# EAGLE board Mego_Bovit_SOIC_3x27P_Kitolt_V11 (EAGLE 7.4.0)
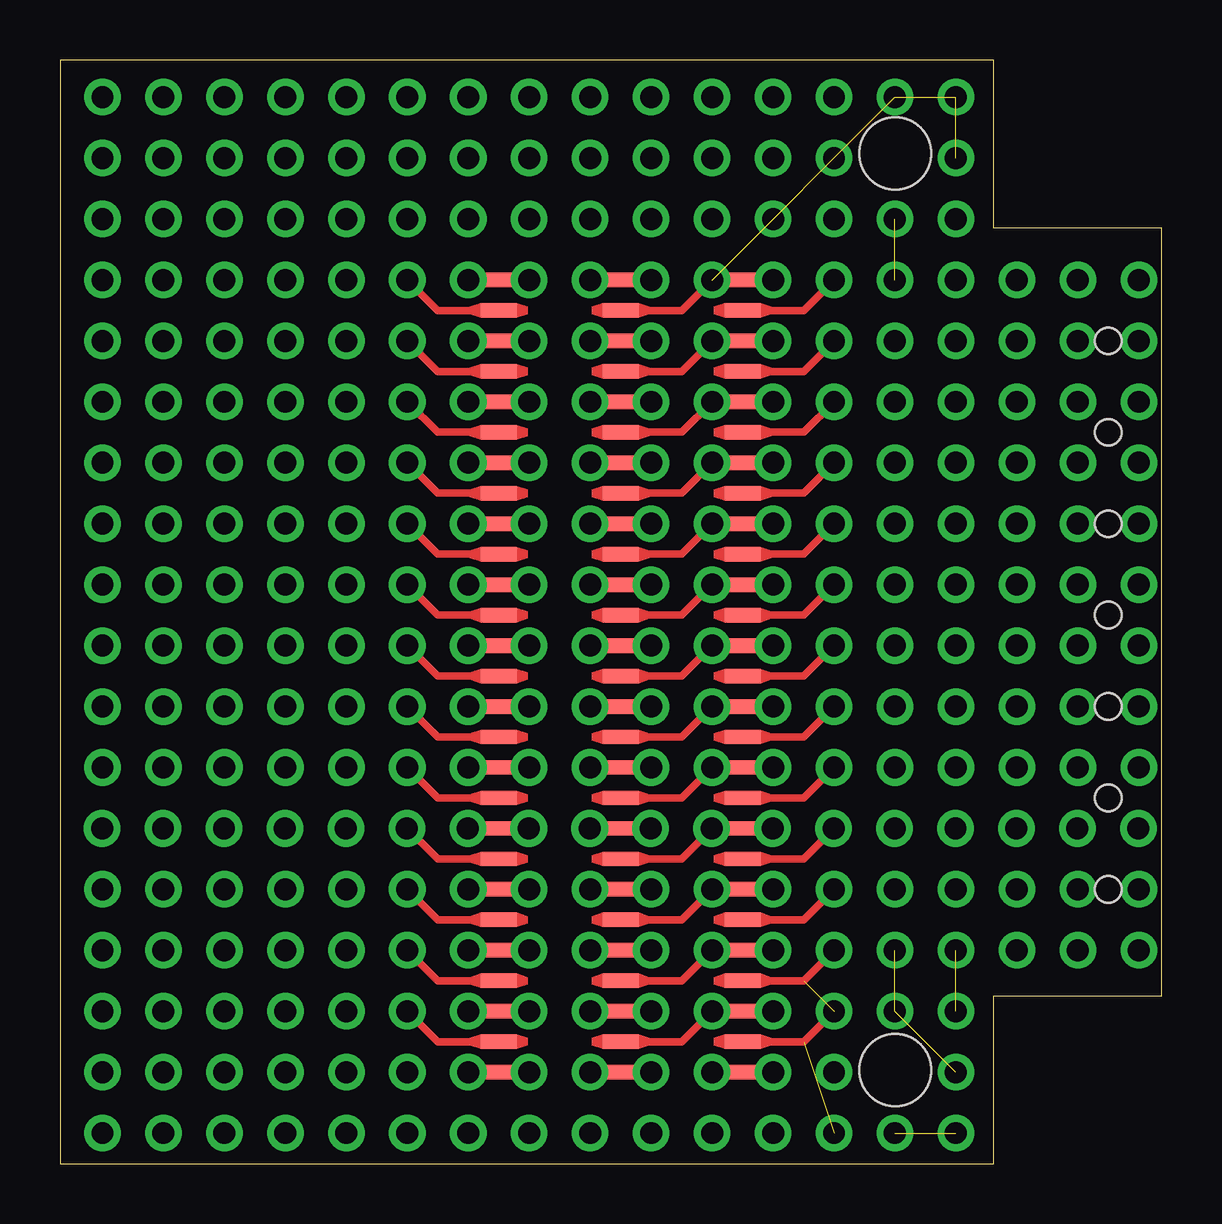
[diagram p0: board, top side]
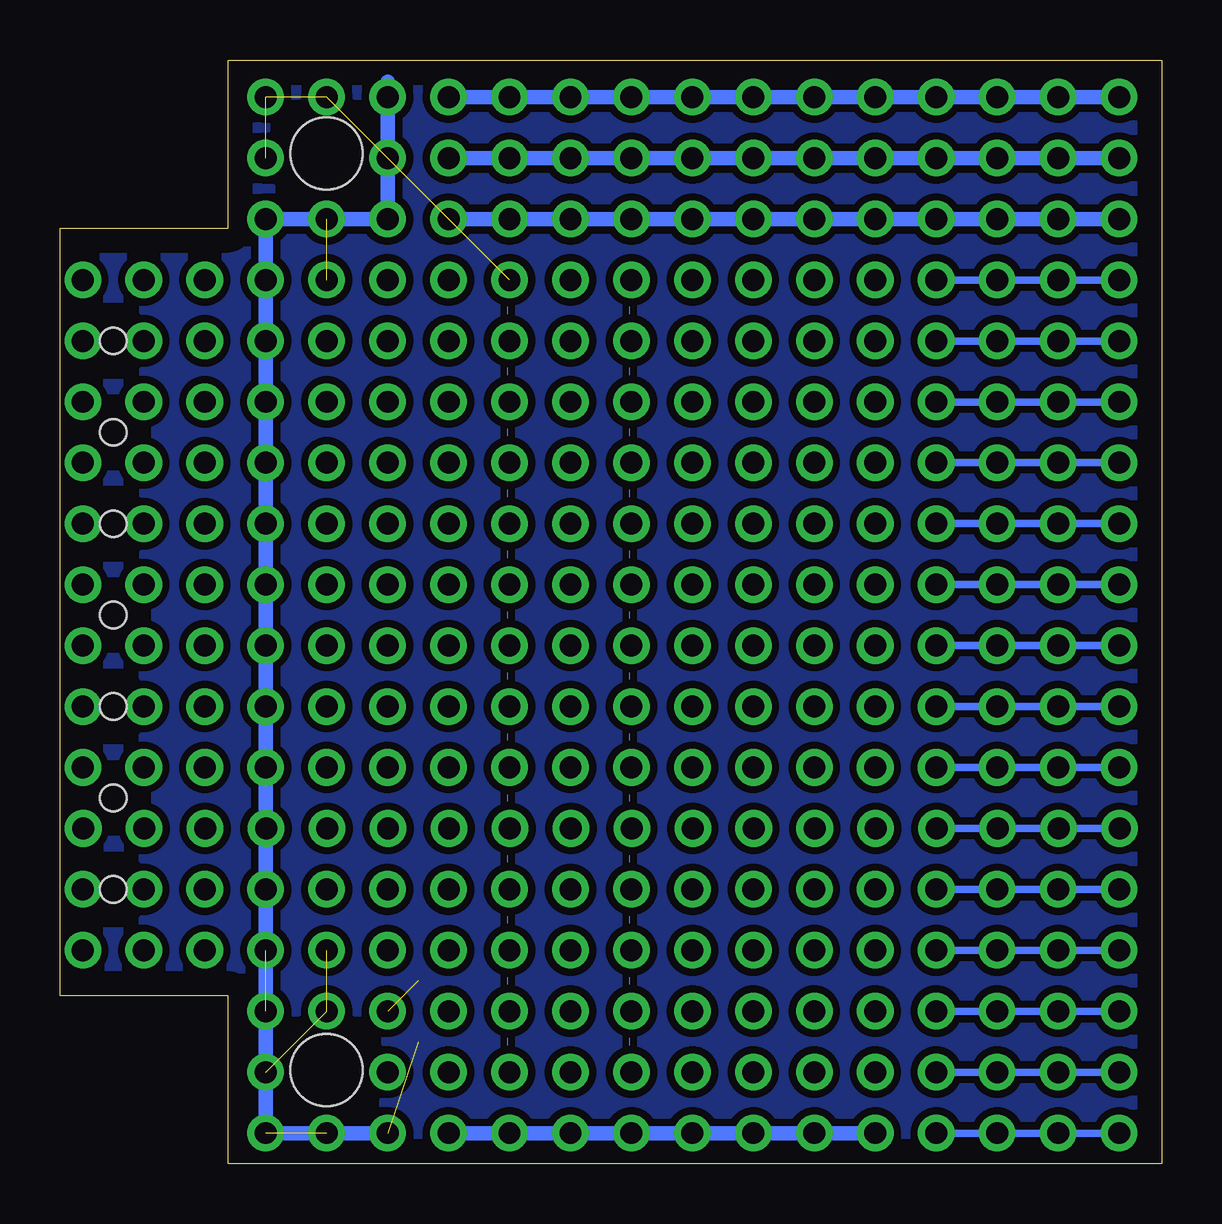
[diagram p1: board, bottom side, seen from below]

Size 45.9 x 46 mm. Coordinates in mm from the lower left corner, seen from the top.
Outline: 38.9,46 0,46 0,0 38.9,0 38.9,7 45.9,7 45.9,39 38.9,39 38.9,46
Copper layers (1*16): Top 0.035mm / dielectric 1.5mm / Bottom 0.035mm
Design rules "default *": minimum track width 10mil, minimum drill 24mil, track to track 12mil, track to pad 12mil, pad to pad 12mil, via to via 12mil, smd to smd 0mil, copper to edge 40mil, drill to drill 8mil, minimum pad ring 10mil, minimum via ring 8mil, stop-mask expansion 4mil, vias tented up to drill 0mil, thermal gap 10mil
Net classes: 0 default: width 0.305 mm, drill 0.61 mm, clearance 0.305 mm
Holes 3 mm at 34.8,42.1 34.8,3.9
Holes 1.1 mm at 43.68,22.86 43.68,26.67 43.68,30.48 43.68,34.29 43.68,19.05 43.68,15.24 43.68,11.43

## Footprints (pad centres in the part's own frame; a part is rotated, then mirrored left to right if it is on the bottom)
SO8PAIR = smd 1.5 x 0.6: 1 2.54,0; 2 -2.54,0

## Placement (x,y rotation side)
E$1  [SO8PAIR]  20.82,36.83 0 top
E$2  [SO8PAIR]  20.82,35.56 0 top
E$3  [SO8PAIR]  20.82,34.29 0 top
E$4  [SO8PAIR]  20.82,33.02 0 top
E$5  [SO8PAIR]  20.82,31.75 0 top
E$6  [SO8PAIR]  20.82,30.48 0 top
E$7  [SO8PAIR]  20.82,29.21 0 top
E$8  [SO8PAIR]  20.82,27.94 0 top
E$9  [SO8PAIR]  20.82,26.67 0 top
E$10  [SO8PAIR]  20.82,25.4 0 top
E$11  [SO8PAIR]  20.82,24.13 0 top
E$12  [SO8PAIR]  20.82,22.86 0 top
E$13  [SO8PAIR]  20.82,21.59 0 top
E$14  [SO8PAIR]  20.82,20.32 0 top
E$15  [SO8PAIR]  20.82,19.05 0 top
E$16  [SO8PAIR]  20.82,17.78 0 top
E$17  [SO8PAIR]  20.82,16.51 0 top
E$18  [SO8PAIR]  20.82,15.24 0 top
E$19  [SO8PAIR]  20.82,13.97 0 top
E$20  [SO8PAIR]  20.82,12.7 0 top
E$21  [SO8PAIR]  20.82,11.43 0 top
E$22  [SO8PAIR]  20.82,10.16 0 top
E$23  [SO8PAIR]  20.82,8.89 0 top
E$24  [SO8PAIR]  20.82,7.62 0 top
E$25  [SO8PAIR]  20.82,6.35 0 top
E$26  [SO8PAIR]  20.82,5.08 0 top
E$27  [SO8PAIR]  20.82,3.81 0 top
E$28  [SO8PAIR]  25.9,36.83 0 top
E$29  [SO8PAIR]  25.9,35.56 0 top
E$30  [SO8PAIR]  25.9,34.29 0 top
E$31  [SO8PAIR]  25.9,33.02 0 top
E$32  [SO8PAIR]  25.9,31.75 0 top
E$33  [SO8PAIR]  25.9,30.48 0 top
E$34  [SO8PAIR]  25.9,29.21 0 top
E$35  [SO8PAIR]  25.9,27.94 0 top
E$36  [SO8PAIR]  25.9,26.67 0 top
E$37  [SO8PAIR]  25.9,25.4 0 top
E$38  [SO8PAIR]  25.9,24.13 0 top
E$39  [SO8PAIR]  25.9,22.86 0 top
E$40  [SO8PAIR]  25.9,21.59 0 top
E$41  [SO8PAIR]  25.9,20.32 0 top
E$42  [SO8PAIR]  25.9,19.05 0 top
E$43  [SO8PAIR]  25.9,17.78 0 top
E$44  [SO8PAIR]  25.9,16.51 0 top
E$45  [SO8PAIR]  25.9,15.24 0 top
E$46  [SO8PAIR]  25.9,13.97 0 top
E$47  [SO8PAIR]  25.9,12.7 0 top
E$48  [SO8PAIR]  25.9,11.43 0 top
E$49  [SO8PAIR]  25.9,10.16 0 top
E$50  [SO8PAIR]  25.9,8.89 0 top
E$51  [SO8PAIR]  25.9,7.62 0 top
E$52  [SO8PAIR]  25.9,6.35 0 top
E$53  [SO8PAIR]  25.9,5.08 0 top
E$54  [SO8PAIR]  25.9,3.81 0 top

## Library data of the parts
E$1-E$54 = Cf_UC

## Tracks (layer width: path | path; a pad name or v marks a point on that pad's centre or on a via)
N$1
  Top 0.305: 18.28,17.78 15.74,17.78 14.47,19.05
N$2
  Top 0.305: 23.36,17.78 25.9,17.78 27.17,19.05
N$3
  Top 0.305: 18.28,15.24 15.74,15.24 14.47,16.51
N$4
  Top 0.305: 23.36,15.24 25.9,15.24 27.17,16.51
N$5
  Top 0.305: 18.28,12.7 15.74,12.7 14.47,13.97
N$6
  Top 0.305: 23.36,12.7 25.9,12.7 27.17,13.97
N$7
  Top 0.305: 18.28,10.16 15.74,10.16 14.47,11.43
N$8
  Top 0.305: 23.36,10.16 25.9,10.16 27.17,11.43
N$9
  Top 0.305: 18.28,7.62 15.74,7.62 14.47,8.89
N$10
  Top 0.305: 23.36,7.62 25.9,7.62 27.17,8.89
N$11
  Top 0.305: 18.28,5.08 15.74,5.08 14.47,6.35
N$12
  Top 0.305: 23.36,5.08 25.9,5.08 27.17,6.35
N$62  (via drill 0.91 pad 1.52)
  other vias: 1.75,13.97
N$63  (via drill 0.91 pad 1.52)
  Bottom 0.305: v1.77,16.51 v9.39,16.51
N$64  (via drill 0.91 pad 1.52)
  Bottom 0.305: v1.77,19.05 v9.39,19.05
N$65  (via drill 0.91 pad 1.52)
  Bottom 0.305: v1.77,21.59 v9.39,21.59
N$66  (via drill 0.91 pad 1.52)
  Bottom 0.305: v1.77,24.13 v9.39,24.13
N$68  (via drill 0.91 pad 1.52)
  Bottom 0.305: v1.77,1.27 v9.39,1.27
N$69  (via drill 0.91 pad 1.52)
  Bottom 0.305: v1.77,3.81 v9.39,3.81
N$71  (via drill 0.91 pad 1.52)
  Bottom 0.305: v1.77,8.89 v9.39,8.89
N$72  (via drill 0.91 pad 1.52)
  Bottom 0.305: v1.77,26.67 v9.39,26.67
N$73  (via drill 0.91 pad 1.52)
  Bottom 0.305: v1.77,29.21 v9.39,29.21
N$74  (via drill 0.91 pad 1.52)
  Bottom 0.305: v1.77,31.75 v9.39,31.75
N$75  (via drill 0.91 pad 1.52)
  Bottom 0.305: v1.77,34.29 v9.39,34.29
N$76  (via drill 0.91 pad 1.52)
  Bottom 0.305: v1.77,36.83 v9.39,36.83
N$77  (via drill 0.91 pad 1.52)
  Bottom 0.61: v1.77,39.37 v29.71,39.37
N$78  (via drill 0.91 pad 1.52)
  Bottom 0.61: v1.77,41.91 v29.71,41.91
N$79  (via drill 0.91 pad 1.52)
  Bottom 0.61: v1.77,44.45 v29.71,44.45
N$80  (via drill 0.91 pad 1.52)
  other vias: 4.29,13.97
N$82  (via drill 0.91 pad 1.52)
  other vias: 4.31,16.51
N$83  (via drill 0.91 pad 1.52)
  other vias: 4.31,19.05
N$84  (via drill 0.91 pad 1.52)
  other vias: 4.31,21.59
N$85  (via drill 0.91 pad 1.52)
  other vias: 4.31,24.13
N$86  (via drill 0.91 pad 1.52)
  other vias: 4.31,11.43
N$87  (via drill 0.91 pad 1.52)
  other vias: 4.31,1.27
N$88  (via drill 0.91 pad 1.52)
  other vias: 4.31,3.81
N$89  (via drill 0.91 pad 1.52)
  other vias: 4.31,6.35
N$90  (via drill 0.91 pad 1.52)
  other vias: 4.31,8.89
N$91  (via drill 0.91 pad 1.52)
  other vias: 4.31,26.67
N$92  (via drill 0.91 pad 1.52)
  other vias: 4.31,29.21
N$93  (via drill 0.91 pad 1.52)
  other vias: 4.31,31.75
N$94  (via drill 0.91 pad 1.52)
  other vias: 4.31,34.29
N$95  (via drill 0.91 pad 1.52)
  other vias: 4.31,36.83
N$96  (via drill 0.91 pad 1.52)
  other vias: 4.31,39.37
N$97  (via drill 0.91 pad 1.52)
  other vias: 4.31,41.91
N$98  (via drill 0.91 pad 1.52)
  other vias: 4.31,44.45
N$99  (via drill 0.91 pad 1.52)
  other vias: 6.83,13.97
N$100  (via drill 0.91 pad 1.52)
  other vias: 6.85,16.51
N$101  (via drill 0.91 pad 1.52)
  other vias: 6.85,19.05
N$102  (via drill 0.91 pad 1.52)
  other vias: 6.85,21.59
N$103  (via drill 0.91 pad 1.52)
  other vias: 6.85,24.13
N$104  (via drill 0.91 pad 1.52)
  other vias: 6.85,11.43
N$105  (via drill 0.91 pad 1.52)
  other vias: 6.85,1.27
N$106  (via drill 0.91 pad 1.52)
  other vias: 6.85,3.81
N$107  (via drill 0.91 pad 1.52)
  other vias: 6.85,6.35
N$108  (via drill 0.91 pad 1.52)
  other vias: 6.85,8.89
N$109  (via drill 0.91 pad 1.52)
  other vias: 6.85,26.67
N$110  (via drill 0.91 pad 1.52)
  other vias: 6.85,29.21
N$111  (via drill 0.91 pad 1.52)
  other vias: 6.85,31.75
N$112  (via drill 0.91 pad 1.52)
  other vias: 6.85,34.29
N$113  (via drill 0.91 pad 1.52)
  other vias: 6.85,36.83
N$114  (via drill 0.91 pad 1.52)
  other vias: 6.85,39.37
N$115  (via drill 0.91 pad 1.52)
  other vias: 6.85,41.91
N$116  (via drill 0.91 pad 1.52)
  other vias: 6.85,44.45
N$117  (via drill 0.91 pad 1.52)
  other vias: 9.37,13.97
N$118
  Bottom 0.305: 1.77,13.97 9.39,13.97
N$122  (via drill 0.91 pad 1.52)
  Bottom 0.305: v9.39,11.43 v1.77,11.43
N$125  (via drill 0.91 pad 1.52)
  Bottom 0.305: v9.39,6.35 v1.77,6.35
N$132  (via drill 0.91 pad 1.52)
  other vias: 9.39,39.37
N$133  (via drill 0.91 pad 1.52)
  other vias: 9.39,41.91
N$134  (via drill 0.91 pad 1.52)
  other vias: 9.39,44.45
N$135  (via drill 0.91 pad 1.52)
  other vias: 11.91,13.97
N$136  (via drill 0.91 pad 1.52)
  other vias: 11.93,16.51
N$137  (via drill 0.91 pad 1.52)
  other vias: 11.93,19.05
N$138  (via drill 0.91 pad 1.52)
  other vias: 11.93,21.59
N$139  (via drill 0.91 pad 1.52)
  other vias: 11.93,24.13
N$140  (via drill 0.91 pad 1.52)
  other vias: 11.93,11.43
N$142  (via drill 0.91 pad 1.52)
  other vias: 11.93,3.81
N$143  (via drill 0.91 pad 1.52)
  other vias: 11.93,6.35
N$144  (via drill 0.91 pad 1.52)
  other vias: 11.93,8.89
N$145  (via drill 0.91 pad 1.52)
  other vias: 11.93,26.67
N$146  (via drill 0.91 pad 1.52)
  other vias: 11.93,29.21
N$147  (via drill 0.91 pad 1.52)
  other vias: 11.93,31.75
N$148  (via drill 0.91 pad 1.52)
  other vias: 11.93,34.29
N$149  (via drill 0.91 pad 1.52)
  other vias: 11.93,36.83
N$150  (via drill 0.91 pad 1.52)
  other vias: 11.93,39.37
N$151  (via drill 0.91 pad 1.52)
  other vias: 11.93,41.91
N$152  (via drill 0.91 pad 1.52)
  other vias: 11.93,44.45
N$153  (via drill 0.91 pad 1.52)
  other vias: 14.45,13.97
N$154  (via drill 0.91 pad 1.52)
  other vias: 14.47,16.51
N$155  (via drill 0.91 pad 1.52)
  other vias: 14.47,19.05
N$156  (via drill 0.91 pad 1.52)
  Top 0.305: 18.28,20.32 15.74,20.32 v14.47,21.59
N$157  (via drill 0.91 pad 1.52)
  Top 0.305: 18.28,22.86 15.74,22.86 v14.47,24.13
N$158  (via drill 0.91 pad 1.52)
  other vias: 14.47,11.43
N$159  (via drill 0.91 pad 1.52)
  other vias: 14.47,1.27
N$160  (via drill 0.91 pad 1.52)
  other vias: 14.47,3.81
N$161  (via drill 0.91 pad 1.52)
  other vias: 14.47,6.35
N$162  (via drill 0.91 pad 1.52)
  other vias: 14.47,8.89
N$163  (via drill 0.91 pad 1.52)
  Top 0.305: 18.28,25.4 15.74,25.4 v14.47,26.67
N$164  (via drill 0.91 pad 1.52)
  Top 0.305: 18.28,27.94 15.74,27.94 v14.47,29.21
N$165  (via drill 0.91 pad 1.52)
  Top 0.305: 18.28,30.48 15.74,30.48 v14.47,31.75
N$166  (via drill 0.91 pad 1.52)
  Top 0.305: 18.28,33.02 15.74,33.02 v14.47,34.29
N$167  (via drill 0.91 pad 1.52)
  Top 0.305: 18.28,35.56 15.74,35.56 v14.47,36.83
N$168  (via drill 0.91 pad 1.52)
  other vias: 14.47,39.37
N$169  (via drill 0.91 pad 1.52)
  other vias: 14.47,41.91
N$170  (via drill 0.91 pad 1.52)
  other vias: 14.47,44.45
N$171  (via drill 0.91 pad 1.52)
  other vias: 16.99,13.97
N$172  (via drill 0.91 pad 1.52)
  other vias: 17.01,16.51
N$173  (via drill 0.91 pad 1.52)
  other vias: 17.01,19.05
N$174  (via drill 0.91 pad 1.52)
  other vias: 17.01,21.59
N$175  (via drill 0.91 pad 1.52)
  other vias: 17.01,24.13
N$176  (via drill 0.91 pad 1.52)
  other vias: 17.01,11.43
N$177  (via drill 0.91 pad 1.52)
  other vias: 17.01,1.27
N$178  (via drill 0.91 pad 1.52)
  other vias: 17.01,3.81
N$179  (via drill 0.91 pad 1.52)
  other vias: 17.01,6.35
N$180  (via drill 0.91 pad 1.52)
  other vias: 17.01,8.89
N$181  (via drill 0.91 pad 1.52)
  other vias: 17.01,26.67
N$182  (via drill 0.91 pad 1.52)
  other vias: 17.01,29.21
N$183  (via drill 0.91 pad 1.52)
  other vias: 17.01,31.75
N$184  (via drill 0.91 pad 1.52)
  other vias: 17.01,34.29
N$185  (via drill 0.91 pad 1.52)
  other vias: 17.01,36.83
N$186  (via drill 0.91 pad 1.52)
  other vias: 17.01,39.37
N$187  (via drill 0.91 pad 1.52)
  other vias: 17.01,41.91
N$189  (via drill 0.91 pad 1.52)
  other vias: 17.01,44.45
N$190  (via drill 0.91 pad 1.52)
  other vias: 19.53,13.97
N$191  (via drill 0.91 pad 1.52)
  other vias: 19.55,16.51
N$192  (via drill 0.91 pad 1.52)
  other vias: 19.55,19.05
N$193  (via drill 0.91 pad 1.52)
  other vias: 19.55,21.59
N$194  (via drill 0.91 pad 1.52)
  other vias: 19.55,24.13
N$195  (via drill 0.91 pad 1.52)
  other vias: 19.55,11.43
N$196  (via drill 0.91 pad 1.52)
  other vias: 19.55,1.27
N$197  (via drill 0.91 pad 1.52)
  other vias: 19.55,3.81
N$198  (via drill 0.91 pad 1.52)
  other vias: 19.55,6.35
N$199  (via drill 0.91 pad 1.52)
  other vias: 19.55,8.89
N$200  (via drill 0.91 pad 1.52)
  other vias: 19.55,26.67
N$201  (via drill 0.91 pad 1.52)
  other vias: 19.55,29.21
N$202  (via drill 0.91 pad 1.52)
  other vias: 19.55,31.75
N$203  (via drill 0.91 pad 1.52)
  other vias: 19.55,34.29
N$204  (via drill 0.91 pad 1.52)
  other vias: 19.55,36.83
N$205  (via drill 0.91 pad 1.52)
  other vias: 19.55,39.37
N$206  (via drill 0.91 pad 1.52)
  other vias: 19.55,41.91
N$207  (via drill 0.91 pad 1.52)
  other vias: 19.55,44.45
N$208  (via drill 0.91 pad 1.52)
  other vias: 22.07,13.97
N$209  (via drill 0.91 pad 1.52)
  other vias: 22.09,16.51
N$210  (via drill 0.91 pad 1.52)
  other vias: 22.09,19.05
N$211  (via drill 0.91 pad 1.52)
  other vias: 22.09,21.59
N$212  (via drill 0.91 pad 1.52)
  other vias: 22.09,24.13
N$213  (via drill 0.91 pad 1.52)
  other vias: 22.09,11.43
N$214  (via drill 0.91 pad 1.52)
  other vias: 22.09,1.27
N$215  (via drill 0.91 pad 1.52)
  other vias: 22.09,3.81
N$216  (via drill 0.91 pad 1.52)
  other vias: 22.09,6.35
N$217  (via drill 0.91 pad 1.52)
  other vias: 22.09,8.89
N$218  (via drill 0.91 pad 1.52)
  other vias: 22.09,26.67
N$219  (via drill 0.91 pad 1.52)
  other vias: 22.09,29.21
N$220  (via drill 0.91 pad 1.52)
  other vias: 22.09,31.75
N$221  (via drill 0.91 pad 1.52)
  other vias: 22.09,34.29
N$222  (via drill 0.91 pad 1.52)
  other vias: 22.09,36.83
N$224  (via drill 0.91 pad 1.52)
  other vias: 22.09,39.37
N$225  (via drill 0.91 pad 1.52)
  other vias: 22.09,41.91
N$226  (via drill 0.91 pad 1.52)
  other vias: 22.09,44.45
N$227  (via drill 0.91 pad 1.52)
  other vias: 24.61,13.97
N$228  (via drill 0.91 pad 1.52)
  other vias: 24.63,16.51
N$229  (via drill 0.91 pad 1.52)
  other vias: 24.63,19.05
N$230  (via drill 0.91 pad 1.52)
  other vias: 24.63,21.59
N$231  (via drill 0.91 pad 1.52)
  other vias: 24.63,24.13
N$232  (via drill 0.91 pad 1.52)
  other vias: 24.63,11.43
N$233  (via drill 0.91 pad 1.52)
  other vias: 24.63,1.27
N$234  (via drill 0.91 pad 1.52)
  other vias: 24.63,3.81
N$235  (via drill 0.91 pad 1.52)
  other vias: 24.63,6.35
N$236  (via drill 0.91 pad 1.52)
  other vias: 24.63,8.89
N$237  (via drill 0.91 pad 1.52)
  other vias: 24.63,26.67
N$238  (via drill 0.91 pad 1.52)
  other vias: 24.63,29.21
N$239  (via drill 0.91 pad 1.52)
  other vias: 24.63,31.75
N$240  (via drill 0.91 pad 1.52)
  other vias: 24.63,34.29
N$241  (via drill 0.91 pad 1.52)
  other vias: 24.63,36.83
N$242  (via drill 0.91 pad 1.52)
  other vias: 24.63,39.37
N$243  (via drill 0.91 pad 1.52)
  other vias: 24.63,41.91
N$244  (via drill 0.91 pad 1.52)
  other vias: 24.63,44.45
N$245  (via drill 0.91 pad 1.52)
  other vias: 27.15,13.97
N$246  (via drill 0.91 pad 1.52)
  other vias: 27.17,16.51
N$247  (via drill 0.91 pad 1.52)
  other vias: 27.17,19.05
N$248  (via drill 0.91 pad 1.52)
  Top 0.305: 23.36,20.32 25.9,20.32 v27.17,21.59
N$249  (via drill 0.91 pad 1.52)
  Top 0.305: 23.36,22.86 25.9,22.86 v27.17,24.13
N$250  (via drill 0.91 pad 1.52)
  other vias: 27.17,11.43
N$251  (via drill 0.91 pad 1.52)
  other vias: 27.17,1.27
N$252  (via drill 0.91 pad 1.52)
  other vias: 27.17,3.81
N$253  (via drill 0.91 pad 1.52)
  other vias: 27.17,6.35
N$254  (via drill 0.91 pad 1.52)
  other vias: 27.17,8.89
N$255  (via drill 0.91 pad 1.52)
  Top 0.305: 23.36,25.4 25.9,25.4 v27.17,26.67
N$256  (via drill 0.91 pad 1.52)
  Top 0.305: 23.36,27.94 25.9,27.94 v27.17,29.21
N$257  (via drill 0.91 pad 1.52)
  Top 0.305: 23.36,30.48 25.9,30.48 v27.17,31.75
N$258  (via drill 0.91 pad 1.52)
  Top 0.305: 23.36,33.02 25.9,33.02 v27.17,34.29
N$259  (via drill 0.91 pad 1.52)  (3 unrouted)
  Top 0.305: 23.36,35.56 25.9,35.56 v27.17,36.83
  other vias: 37.33,44.45 34.79,44.45 37.33,41.91
N$260  (via drill 0.91 pad 1.52)
  other vias: 27.17,39.37
N$261  (via drill 0.91 pad 1.52)
  other vias: 27.17,41.91
N$262  (via drill 0.91 pad 1.52)
  other vias: 27.17,44.45
N$263  (via drill 0.91 pad 1.52)
  other vias: 29.69,13.97
N$264  (via drill 0.91 pad 1.52)
  other vias: 29.71,16.51
N$265  (via drill 0.91 pad 1.52)
  other vias: 29.71,19.05
N$266  (via drill 0.91 pad 1.52)
  other vias: 29.71,21.59
N$267  (via drill 0.91 pad 1.52)
  other vias: 29.71,24.13
N$268  (via drill 0.91 pad 1.52)
  other vias: 29.71,11.43
N$269  (via drill 0.91 pad 1.52)
  Bottom 0.61: v29.71,1.27 v11.93,1.27
N$270  (via drill 0.91 pad 1.52)
  other vias: 29.71,3.81
N$271  (via drill 0.91 pad 1.52)
  other vias: 29.71,6.35
N$272  (via drill 0.91 pad 1.52)
  other vias: 29.71,8.89
N$273  (via drill 0.91 pad 1.52)
  other vias: 29.71,26.67
N$274  (via drill 0.91 pad 1.52)
  other vias: 29.71,29.21
N$275  (via drill 0.91 pad 1.52)
  other vias: 29.71,31.75
N$276  (via drill 0.91 pad 1.52)
  other vias: 29.71,34.29
N$277  (via drill 0.91 pad 1.52)
  other vias: 29.71,36.83
N$281  (via drill 0.91 pad 1.52)
  other vias: 32.23,13.97
N$282  (via drill 0.91 pad 1.52)
  Top 0.305: 28.44,15.24 30.98,15.24 v32.25,16.51
N$283  (via drill 0.91 pad 1.52)
  Top 0.305: 28.44,17.78 30.98,17.78 v32.25,19.05
N$284  (via drill 0.91 pad 1.52)
  Top 0.305: 28.44,20.32 30.98,20.32 v32.25,21.59
N$285  (via drill 0.91 pad 1.52)
  Top 0.305: 28.44,22.86 30.98,22.86 v32.25,24.13
N$286  (via drill 0.91 pad 1.52)
  Top 0.305: 28.44,10.16 30.98,10.16 v32.25,11.43
N$288  (via drill 0.91 pad 1.52)
  other vias: 32.25,3.81
N$291  (via drill 0.91 pad 1.52)
  Top 0.305: 28.44,25.4 30.98,25.4 v32.25,26.67
N$292  (via drill 0.91 pad 1.52)
  Top 0.305: 28.44,27.94 30.98,27.94 v32.25,29.21
N$293  (via drill 0.91 pad 1.52)
  Top 0.305: 28.44,30.48 30.98,30.48 v32.25,31.75
N$294  (via drill 0.91 pad 1.52)
  Top 0.305: 28.44,33.02 30.98,33.02 v32.25,34.29
N$295  (via drill 0.91 pad 1.52)
  Top 0.305: 28.44,35.56 30.98,35.56 v32.25,36.83
N$296  (via drill 0.91 pad 1.52)  (4 unrouted)
  Top 0.305: 28.44,5.08 30.98,5.08 v32.25,6.35 | 28.44,7.62 30.98,7.62 v32.25,8.89
  Bottom 0.61: 32.25,45.09 v32.25,39.37 v37.33,39.37 v37.33,36.83 v37.33,6.35 v37.33,1.27 v32.25,1.27
  other vias: 37.33,8.89 34.79,1.27
N$297  (via drill 0.91 pad 1.52)
  other vias: 32.25,41.91
N$298  (via drill 0.91 pad 1.52)
  other vias: 32.25,44.45
N$299  (via drill 0.91 pad 1.52)
  other vias: 34.77,13.97
N$300  (via drill 0.91 pad 1.52)
  other vias: 34.79,16.51
N$301  (via drill 0.91 pad 1.52)
  other vias: 34.79,19.05
N$302  (via drill 0.91 pad 1.52)
  other vias: 34.79,21.59
N$303  (via drill 0.91 pad 1.52)
  other vias: 34.79,24.13
N$304  (via drill 0.91 pad 1.52)
  other vias: 34.79,11.43
N$305  (via drill 0.91 pad 1.52)  (2 unrouted)
  other vias: 34.79,8.89 34.79,6.35 37.33,3.81
N$306  (via drill 0.91 pad 1.52)
  other vias: 34.79,26.67
N$307  (via drill 0.91 pad 1.52)
  other vias: 34.79,29.21
N$308  (via drill 0.91 pad 1.52)
  other vias: 34.79,31.75
N$309  (via drill 0.91 pad 1.52)
  other vias: 34.79,34.29
N$310  (via drill 0.91 pad 1.52)  (1 unrouted)
  other vias: 34.79,36.83 34.79,39.37
N$311  (via drill 0.91 pad 1.52)
  other vias: 37.31,13.97
N$312  (via drill 0.91 pad 1.52)
  other vias: 37.33,16.51
N$313  (via drill 0.91 pad 1.52)
  other vias: 37.33,19.05
N$314  (via drill 0.91 pad 1.52)
  other vias: 37.33,21.59
N$315  (via drill 0.91 pad 1.52)
  other vias: 37.33,24.13
N$316  (via drill 0.91 pad 1.52)
  other vias: 37.33,11.43
N$318  (via drill 0.91 pad 1.52)
  other vias: 37.33,26.67
N$319  (via drill 0.91 pad 1.52)
  other vias: 37.33,29.21
N$320  (via drill 0.91 pad 1.52)
  other vias: 37.33,31.75
N$321  (via drill 0.91 pad 1.52)
  other vias: 37.33,34.29
N$323  (via drill 0.91 pad 1.52)
  other vias: 39.85,13.97
N$324  (via drill 0.91 pad 1.52)
  other vias: 39.87,16.51
N$325  (via drill 0.91 pad 1.52)
  other vias: 39.87,19.05
N$326  (via drill 0.91 pad 1.52)
  other vias: 39.87,21.59
N$327  (via drill 0.91 pad 1.52)
  other vias: 39.87,24.13
N$328  (via drill 0.91 pad 1.52)
  other vias: 39.87,11.43
N$329  (via drill 0.91 pad 1.52)
  other vias: 39.87,8.89
N$330  (via drill 0.91 pad 1.52)
  other vias: 39.87,26.67
N$331  (via drill 0.91 pad 1.52)
  other vias: 39.87,29.21
N$332  (via drill 0.91 pad 1.52)
  other vias: 39.87,31.75
N$333  (via drill 0.91 pad 1.52)
  other vias: 39.87,34.29
N$334  (via drill 0.91 pad 1.52)
  other vias: 39.87,36.83
N$335  (via drill 0.91 pad 1.52)
  other vias: 42.39,13.97
N$336  (via drill 0.91 pad 1.52)
  other vias: 42.41,16.51
N$337  (via drill 0.91 pad 1.52)
  other vias: 42.41,19.05
N$338  (via drill 0.91 pad 1.52)
  other vias: 42.41,21.59
N$339  (via drill 0.91 pad 1.52)
  other vias: 42.41,24.13
N$340  (via drill 0.91 pad 1.52)
  other vias: 42.41,11.43
N$341  (via drill 0.91 pad 1.52)
  other vias: 42.41,8.89
N$342  (via drill 0.91 pad 1.52)
  other vias: 42.41,26.67
N$343  (via drill 0.91 pad 1.52)
  other vias: 42.41,29.21
N$344  (via drill 0.91 pad 1.52)
  other vias: 42.41,31.75
N$345  (via drill 0.91 pad 1.52)
  other vias: 42.41,34.29
N$346  (via drill 0.91 pad 1.52)
  other vias: 42.41,36.83
N$347  (via drill 0.91 pad 1.52)
  other vias: 44.93,13.97
N$348  (via drill 0.91 pad 1.52)
  other vias: 44.95,16.51
N$349  (via drill 0.91 pad 1.52)
  other vias: 44.95,19.05
N$350  (via drill 0.91 pad 1.52)
  other vias: 44.95,21.59
N$351  (via drill 0.91 pad 1.52)
  other vias: 44.95,24.13
N$352  (via drill 0.91 pad 1.52)
  other vias: 44.95,11.43
N$353  (via drill 0.91 pad 1.52)
  other vias: 44.95,8.89
N$354  (via drill 0.91 pad 1.52)
  other vias: 44.95,26.67
N$355  (via drill 0.91 pad 1.52)
  other vias: 44.95,29.21
N$356  (via drill 0.91 pad 1.52)
  other vias: 44.95,31.75
N$358  (via drill 0.91 pad 1.52)
  other vias: 44.95,34.29
N$359  (via drill 0.91 pad 1.52)
  other vias: 44.95,36.83
S$1
  Top 0.305: 28.44,12.7 30.98,12.7 32.25,13.97
S$2
  pour Bottom: 0.5,45.72 38.6,45.72 38.6,38.73 45.59,38.73 45.59,7.62 38.6,7.62 38.6,0.64 0.5,0.64